# Altium PCB Follow Line Robot Controller PCB.PcbDoc
Units mil, origin at the board's own origin, x right, y up, seen from the top; angles counter-clockwise.
Board outline 6000 x 4000 mil, 2 copper layers (Top Layer, Bottom Layer); 17 components, 25 nets, 107 pads, 0 vias.
Unrouted connection lines stored in the file: 55.
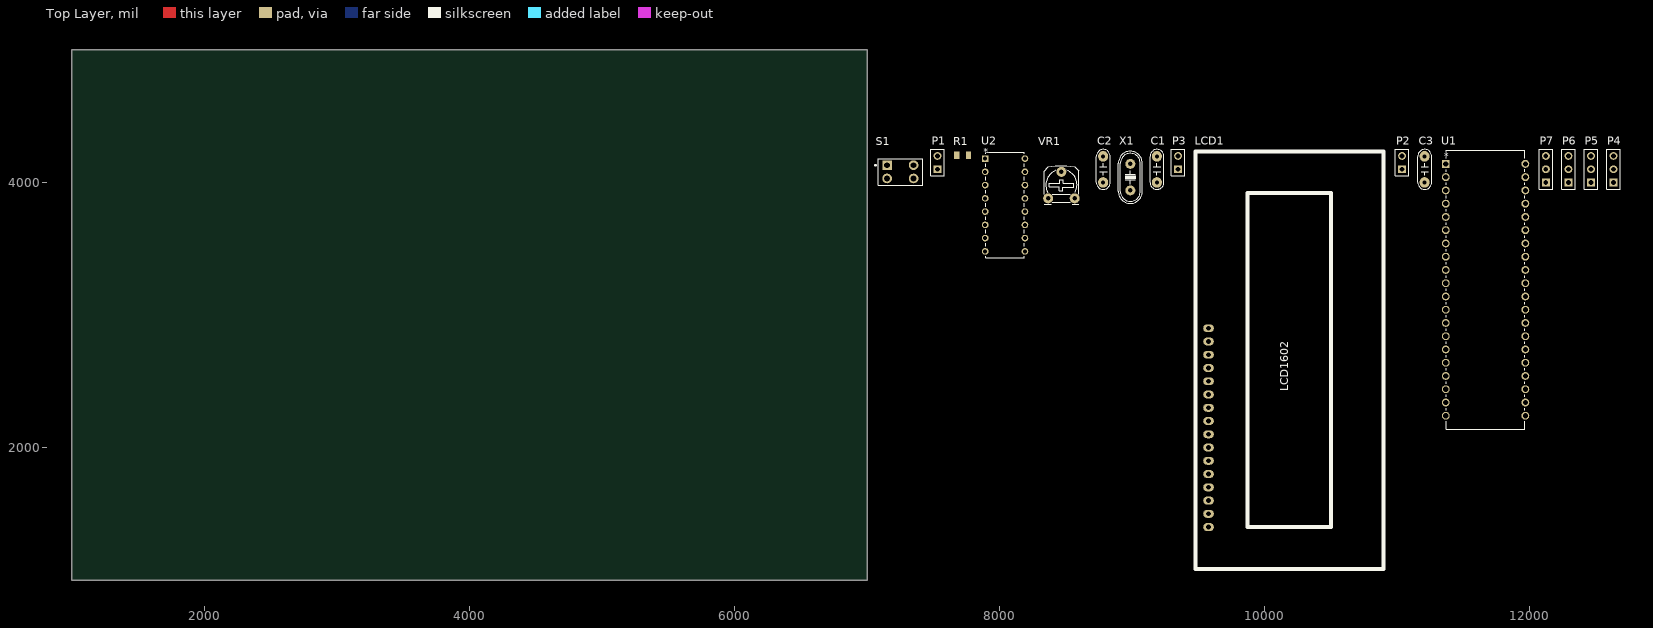
[diagram p0: Top Layer view]
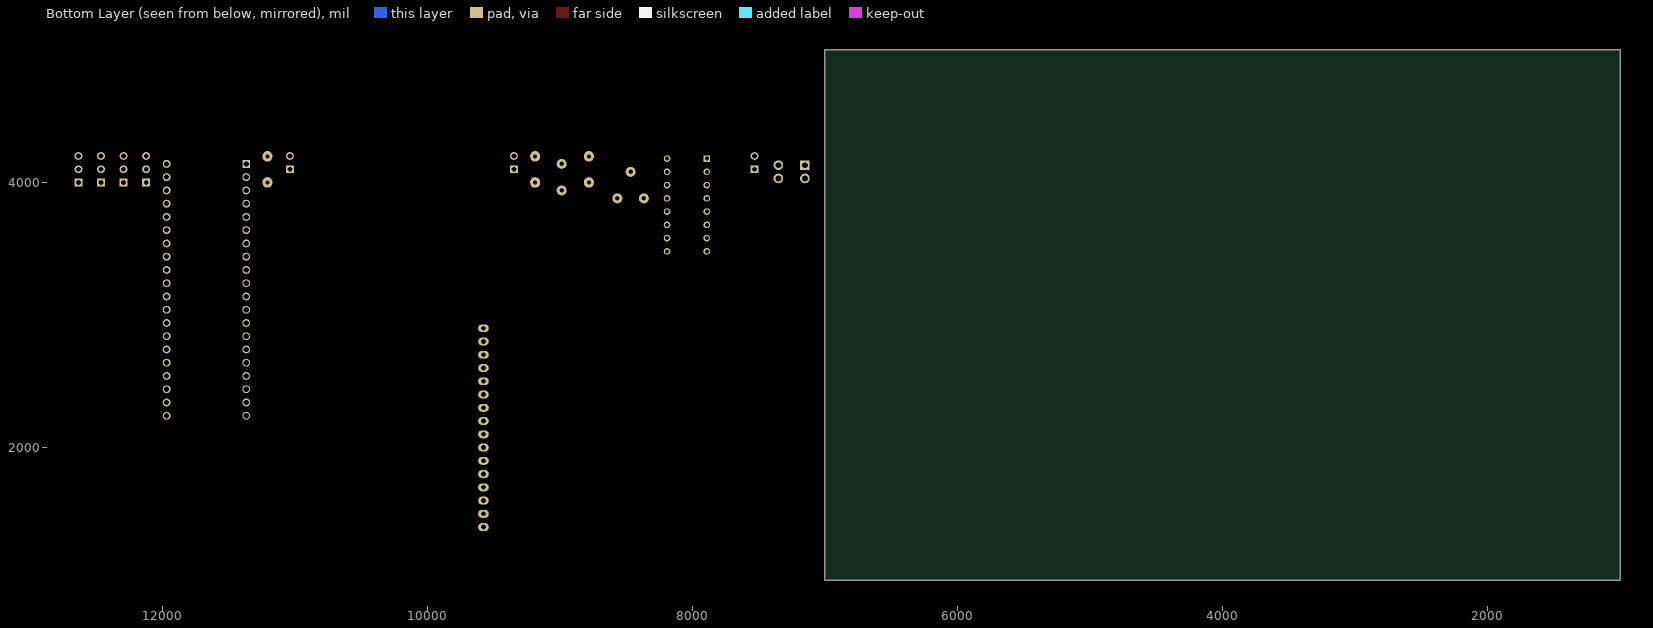
[diagram p1: Bottom Layer view, seen from below]

## Layer stack, top to bottom
Top Solder: solder mask 0.4, Solder Resist, Dk 3.5
Top Layer: signal copper 1.4
Dielectric 1: dielectric 12.6, FR-4, Dk 4.8
Bottom Layer: signal copper 1.4
Bottom Solder: solder mask 0.4, Solder Resist, Dk 3.5

## Board outline
1000,1000 7000,1000 7000,5000 1000,5000

## Design rules (kind name [scope] priority, off if disabled: settings)
Clearance [All] p1: gap=10 ignorepadtopadclearanceinfootprint=FALSE except(0: Arc-Hole Track-Hole SMDPad-Hole THPad-Hole Via-Hole Fill-Hole Poly-Hole Region-Hole Text-Hole)
PolygonConnect [All] p1: connectstyle=Relief reliefconductorwidth=10 reliefentries=4 polygonreliefangle="90 Angle" airgapwidth=10
RoomDefinition "Follow Line Robot Controller Shematic" [InComponentClass('Follow Line Robot Controller Shematic')] p1: confinementstyle=ConfineIn formatcopy=TRUE lockcomponents=FALSE outline 7045,1065 12700,1065 12700,4360 7045,4360
RoutingVias [All] p1: holewidth=28 width=50 viastyle="Through Hole" minholewidth=28 minwidth=50 maxholewidth=28 maxwidth=50
SolderMaskExpansion [All] p1: expansion=4 istentingtop=FALSE
Width [All] p1: maxlimit=10 minlimit=10 preferedwidth=10
30 further rules are at their usual default settings.

## Components (designator, comment, footprint, x,y, rotation, side; value= is the part's Value field where it differs from the comment)
C1 "Cap Cer" CN3 9185,4000 r90 top value=22pF
C2 "Cap Cer" CN3 8780,4000 r90 top value=22pF
C3 "Cap Cer" CN3 11205,4000 r90 top value=100nF
LCD1 "LCD1602" LCD1602 9575,1400 r90 top
P1 "Vin" HDR1X2 7530,4100 r90 top
P2 "Left Motor" HDR1X2 11035,4100 r90 top
P3 "Right Motor" HDR1X2 9345,4100 r90 top
P4 "Far Left IR" HDR1X3 12630,4000 r90 top
P5 "Left IR" HDR1X3 12460,4000 r90 top
P6 "Right IR" HDR1X3 12290,4000 r90 top
P7 "Far Right IR" HDR1X3 12120,4000 r90 top
R1 "RESET" "SMD R1206" 7695,4205 r0 top value=10K
S1 "SW-DPST" DPST-4 7250,4080 r0 top
U1 "PIC18F4520-E/P" PDIP40_600MC_MCH 11365,4140 r0 top
U2 "L293D" PowerDIP-16_STM 7890,4180 r0 top
VR1 "10K" VR 8365,3880 r0 top value="VR 10K"
X1 "4Mhz" XT2 8985,4040 r90 top

## Footprints (in the part's own frame and the unit in brackets; to place one, negate y for a bottom-side part, rotate by r counter-clockwise, add the part's x,y. Pads: shape width x height; smd on the part's side, far side on the other; paste and mask are expansions set on the pad)
CN3 [mil]
  oval 80x75 hole 31: 1(0,0) 2(196.85,0)
  silkscreen extent -53,-53 249,51, body extent -34,-56 244,46, height 360
DPST-4 [mm]
  rect 1.85x1.85 hole 1.1: 1(-2.54,1.27)
  round 1.85 hole 1.1: 2(-2.54,-1.27) 3(2.54,-1.27) 4(2.54,1.27)
  silkscreen extent -4.88,-2.54 4.28,2.54, body extent -3.73,-2.15 4.53,4.35, height 5
HDR1X2 [mm]
  rect 1.5x1.5 hole 0.9: 1(0,0)
  round 1.5 hole 0.9: 2(2.54,0)
  silkscreen extent -1.27,-1.27 3.81,1.27, body extent -1.27,-1.24 3.81,1.25, height 8.54
HDR1X3 [mm]
  rect 1.5x1.5 hole 0.9: 1(0,0)
  round 1.5 hole 0.9: 2(2.54,0) 3(5.08,0)
  silkscreen extent -1.27,-1.27 6.35,1.27, body extent -1.27,-1.46 6.35,1.46, height 8.51
LCD1602 [mil]
  oval 60x80 hole 35.43: 1(0,0) 2(100,0) 3(200,0) 4(300,0) 5(400,0) 6(500,0) 7(600,0) 8(700,0) 9(800,0) 10(900,0) 11(1000,0) 12(1100,0) 13(1200,0) 14(1300,0) 15(1400,0) 16(1500,0)
  silkscreen extent -315,-1319 2835,98, body extent -315,-1357 2854,80, height 414
PDIP40_600MC_MCH [mil]
  rect 59x59 hole 39 mask+0: 1(0,0)
  round 59 hole 39 mask+0: 2(0,-100) 3(0,-200) 4(0,-300) 5(0,-400) 6(0,-500) 7(0,-600) 8(0,-700) 9(0,-800) 10(0,-900) 11(0,-1000) 12(0,-1100) 13(0,-1200) 14(0,-1300) 15(0,-1400) 16(0,-1500) 17(0,-1600) 18(0,-1700) 19(0,-1800) 20(0,-1900) 21(600,-1900) 22(600,-1800) 23(600,-1700) 24(600,-1600) 25(600,-1500) 26(600,-1400) 27(600,-1300) 28(600,-1200) 29(600,-1100) 30(600,-1000) 31(600,-900) 32(600,-800) 33(600,-700) 34(600,-600) 35(600,-500) 36(600,-400) 37(600,-300) 38(600,-200) 39(600,-100) 40(600,0)
  silkscreen extent 5,-2002 595,102, body extent -5,-1997 615,97, height 255
PowerDIP-16_STM [mil]
  rect 50x50 hole 30 mask+0: 1(0,0)
  round 50 hole 30 mask+0: 2(0,-100) 3(0,-200) 4(0,-300) 5(0,-400) 6(0,-500) 7(0,-600) 8(0,-700) 9(300,-700) 10(300,-600) 11(300,-500) 12(300,-400) 13(300,-300) 14(300,-200) 15(300,-100) 16(300,0)
  silkscreen extent 5,-748 295,48, body extent -5,-744 315,44, height 206
"SMD R1206" [mm]
  rect 1x1.5 smd: 1(-0.5,0) 2(1.75,0)
  body extent -1.02,-0.8 2.18,0.8, height 0.6
VR [mil]
  round 75 hole 35: 1(0,0) 2(100,200) 3(200,0)
  silkscreen extent -31,-44 231,246, body extent -87,-30 307,372, height 165
XT2 [mil]
  round 75 hole 34: 1(-100,0) 2(100,0)
  silkscreen extent -198,-90 195,90, body extent -233,-93 213,90, height 138

## Part data
C1 C2 C3: library part CN3, "Cap np W0.3"
P1 P2 P3: library part "Header 2", "Header, 2-Pin", LatestRevisionDate=17-Jul-2002, LatestRevisionNote="Re-released for DXP Platform.", Publisher="Altium Limited"
P4 P5 P6 P7: library part "Header 3", "Header, 3-Pin", LatestRevisionDate=17-Jul-2002, LatestRevisionNote="Re-released for DXP Platform.", Publisher="Altium Limited"
R1: library part Res2_1, "Resistor", LatestRevisionDate=17-Jul-2002, LatestRevisionNote="Re-released for DXP Platform.", PackageDescription="Axial Device, Thru-Hole; 2 Leads; 0.4 in Pin Spacing", PackageReference=AXIAL-0.4, Published=8-Jun-2000, Publisher="Altium Limited"
S1: "Double-Pole, Single-Throw Switch", LatestRevisionDate=17-Jul-2002, LatestRevisionNote="Re-released for DXP Platform.", PackageDescription="Switch; 4 Leads", PackageReference=DPST-4, Published=24-Mar-1999, Publisher="Altium Limited"
U1: "No Description Available", Mfr_Name=Microchip, Copyright="Copyright (C) 2022 Ultra Librarian. All rights reserved.", Manufacturer_Part_Number=PIC18F4520-E/P, RefDes=RefDes, Type=DEV
U2: "No Description Available", Mfr_Name=STMicroelectronics, Copyright="Copyright (C) 2022 Ultra Librarian. All rights reserved.", Manufacturer_Part_Number=L293D, RefDes=RefDes, Type=DEV
VR1: library part VR1, "Var Resistor"
X1: library part XT2, "Crystal For all Crystal 2pin."

## Nets (pads, with @x,y where several pads share a name; then routed paths per layer and width w, separated by ;. In a path a pad name is that pad's centre, name@x,y a point inside that pad or via, vN(x,y) a via of type N, cw(c..) or ccw(c..) an arc to the next point about the centre after c; other vN are vias at no path point)
GND: C1.2 C2.2 C3.1 LCD1.1 LCD1.5 P1.2 P4.3 P5.3 P6.3 P7.3 S1.1 U2.4 U2.5 U2.12 U2.13 VR1.3
Input1: U1.15 U2.2
Input2: U1.16 U2.7
Input3: U1.17 U2.10
Input4: U1.18 U2.15
IRSensor1: P4.2 U1.33
IRSensor2: P5.2 U1.34
IRSensor3: P6.2 U1.35
IRSensor4: P7.2 U1.36
NetLCD1_3: LCD1.3 VR1.2
OSC1: C2.1 U1.13 X1.1
OSC2: C1.1 U1.14 X1.2
Output1: P2.1 U2.3
Output2: P2.2 U2.6
Output3: P3.1 U2.14
Output4: P3.2 U2.11
RD0: LCD1.11 U1.19
RD1: LCD1.12 U1.20
RD2: LCD1.13 U1.21
RD3: LCD1.14 U1.22
RD4: LCD1.4 U1.23
RD5: LCD1.6 U1.24
Reset1: R1.1 S1.2 U1.1
VDD1: C3.2 LCD1.2 P1.1 P4.1 P5.1 P6.1 P7.1 R1.2 U1.11 U1.32 U2.1 U2.8 U2.9 U2.16 VR1.1
VSS1: U1.12 U1.31
pads on no net: LCD1.7 LCD1.8 LCD1.9 LCD1.10 LCD1.15 LCD1.16 S1.3 S1.4 U1.2 U1.3 U1.4 U1.5 U1.6 U1.7 U1.8 U1.9 U1.10 U1.25 U1.26 U1.27 U1.28 U1.29 U1.30 U1.37 U1.38 U1.39 U1.40

## Text inside footprints (layer, text, board x,y; h text height)
U1: Top Overlay "*" at 11352.5,4174.5 h50; Mechanical 13 "*" at 11372.5,4115 h50
U2: Top Overlay "*" at 7877.5,4210 h50; Mechanical 13 "*" at 7897.5,4155 h50